# EAGLE board connectors (EAGLE 7.2.0)
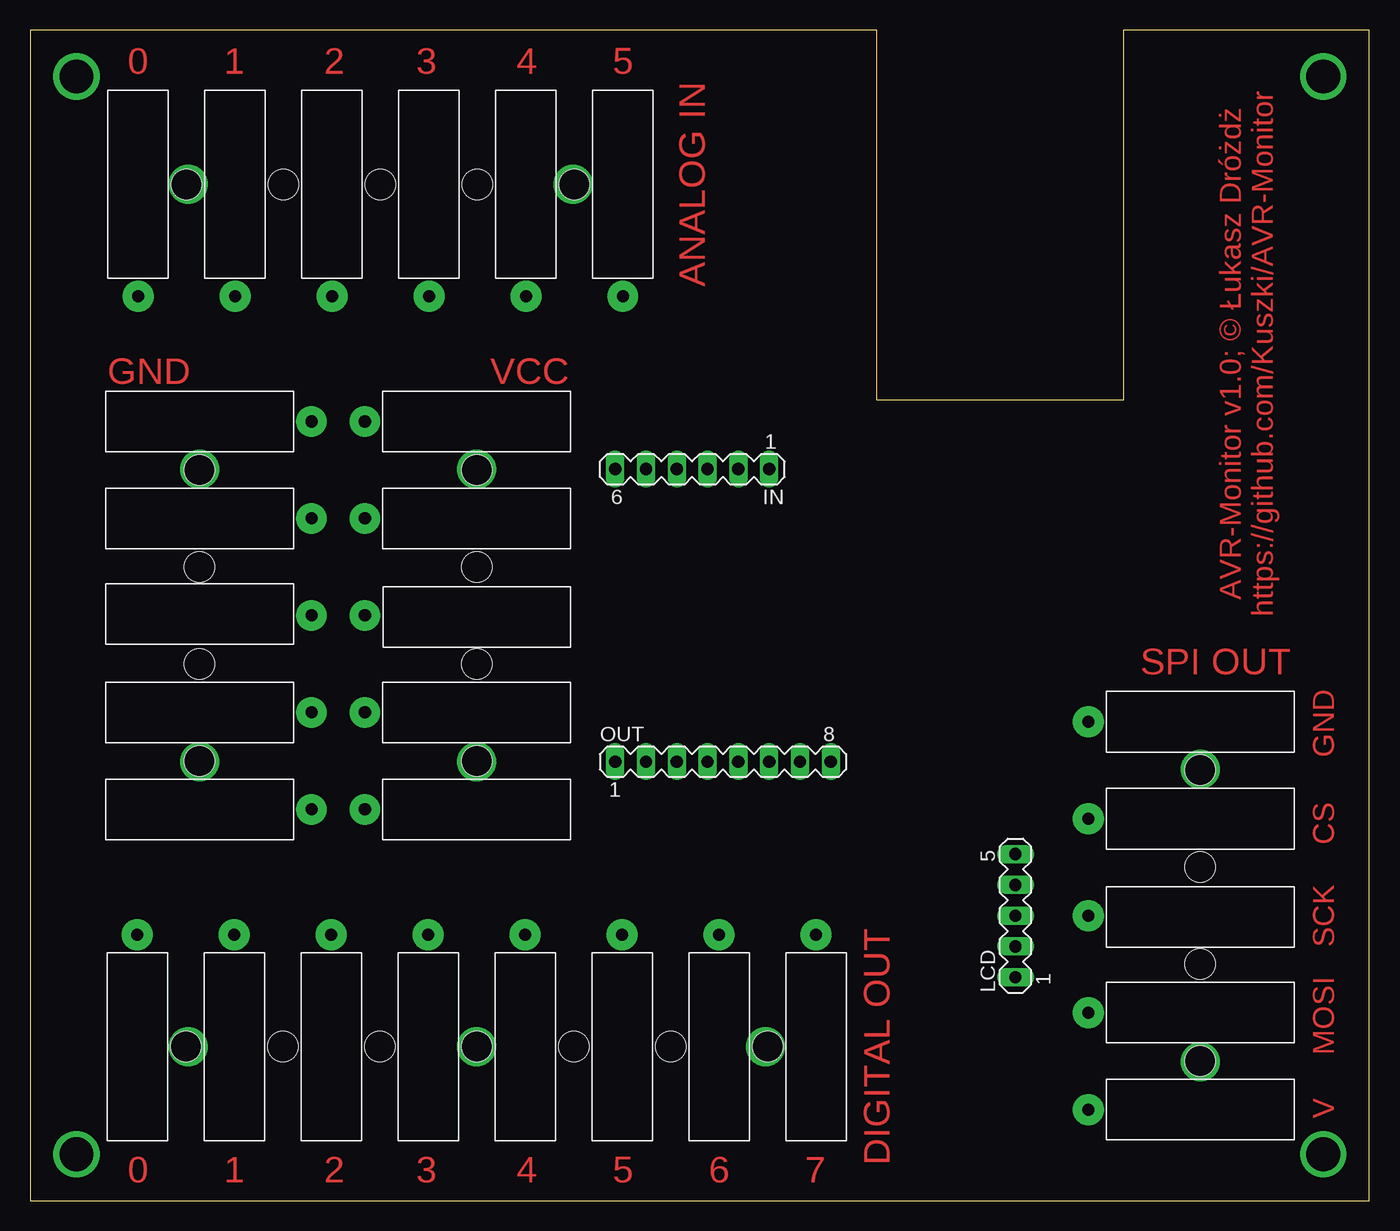
[diagram p0: board, top side]
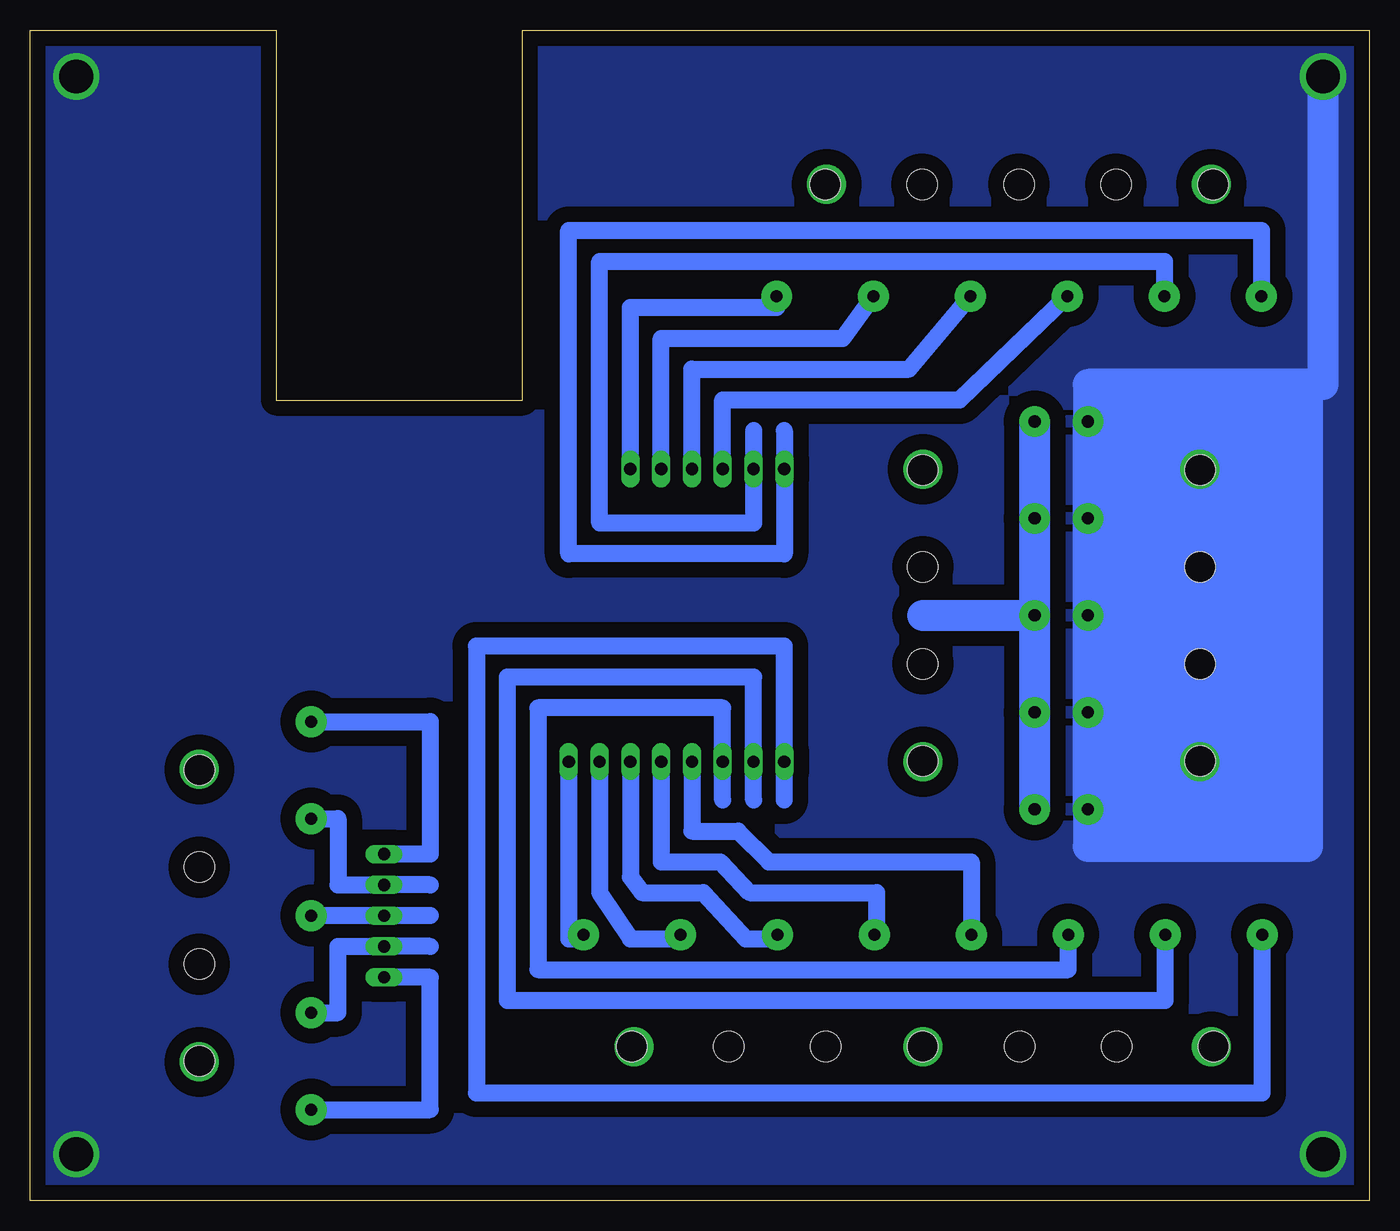
[diagram p1: board, bottom side, seen from below]

Size 110.47 x 96.52 mm. Coordinates in mm from the lower left corner, seen from the top.
Outline: 0,0 110.47,0 110.47,96.51 90.17,96.52 90.17,66.03 69.85,66.03 69.85,96.52 0,96.51 0,0
Copper layers (1*16): Top 0.035mm / dielectric 1.5mm / Bottom 0.035mm
Design rules "default": minimum track width 10mil, minimum drill 24mil, track to track 8mil, track to pad 8mil, pad to pad 8mil, via to via 8mil, smd to smd 8mil, copper to edge 40mil, drill to drill 8mil, minimum pad ring 10mil, minimum via ring 8mil, stop-mask expansion 4mil, vias tented up to drill 0mil, thermal gap 10mil

## Footprints (pad centres in the part's own frame; a part is rotated, then mirrored left to right if it is on the bottom)
MA06-1 = drill 1.016 long: 1 -6.35,0; 2 -3.81,0; 3 -1.27,0; 4 1.27,0; 5 3.81,0; 6 6.35,0
MA05-1 = drill 1.016 long: 1 -5.08,0; 2 -2.54,0; 3 0,0; 4 2.54,0; 5 5.08,0
MA08-1 = drill 1.016 long: 1 -8.89,0; 2 -6.35,0; 3 -3.81,0; 4 -1.27,0; 5 1.27,0; 6 3.81,0; 7 6.35,0; 8 8.89,0
X8 = drill 1 pad 2.54: P$1 -9.23,28; P$2 -9.23,20; P$3 -9.23,12; P$4 -9.23,4; P$5 -9.23,-4; P$6 -9.23,-12; P$7 -9.23,-20; P$8 -9.23,-28 | hole 2.5: 0,0; 0,8; 0,16; 0,-8; 0,-16; 0,-24; 0,24
X5 = drill 1 pad 2.54: P$1 -9.23,16; P$2 -9.23,8; P$3 -9.23,0; P$4 -9.23,-8; P$5 -9.23,-16 | hole 2.5: 0,4; 0,-4; 0,12; 0,-12
X6 = drill 1 pad 2.54: P$1 -9.23,20; P$2 -9.23,12; P$3 -9.23,4; P$4 -9.23,-4; P$5 -9.23,-12; P$6 -9.23,-20 | hole 2.5: 0,-16; 0,16; 0,8; 0,0; 0,-8

## Placement (x,y rotation side)
IN  [MA06-1]  54.61,60.33 180 top
LCD  [MA05-1]  81.28,23.5 90 top
OUT  [MA08-1]  57.15,36.2 0 top
U$1  KOSTKA_2.5MM_X8  [X8]  36.83,12.7 270 top
U$2  KOSTKA_2.5MM_X5  [X5]  36.83,48.26 0 top
U$3  KOSTKA_2.5MM_X6  [X6]  28.89,83.82 90 top
U$4  KOSTKA_2.5MM_X5  [X5]  13.97,48.26 180 top
U$6  KOSTKA_2.5MM_X5  [X5]  96.52,23.5 0 top

## Library data of the parts
IN LCD OUT = con-lstb; OC_FARNELL: unknown; OC_NEWARK: unknown
U$1-U$4 U$6 = kostka

## Nets
GND: U$4.P$1 U$4.P$2 U$4.P$3 U$4.P$4 U$4.P$5
N$1: OUT.8 U$1.P$1
N$3: OUT.7 U$1.P$2
N$4: OUT.6 U$1.P$3
N$5: OUT.5 U$1.P$4
N$6: OUT.4 U$1.P$5
N$7: OUT.3 U$1.P$6
N$8: OUT.2 U$1.P$7
N$9: OUT.1 U$1.P$8
N$17: LCD.1 U$6.P$5
N$24: IN.1 U$3.P$6
N$25: IN.2 U$3.P$5
N$26: IN.3 U$3.P$4
N$27: IN.4 U$3.P$3
N$28: IN.5 U$3.P$2
N$29: IN.6 U$3.P$1
N$36: LCD.2 U$6.P$4
N$37: LCD.3 U$6.P$3
N$38: LCD.4 U$6.P$2
N$39: LCD.5 U$6.P$1
VCC: U$2.P$1 U$2.P$2 U$2.P$3 U$2.P$4 U$2.P$5

## Tracks (layer width: path | path; a pad name or v marks a point on that pad's centre or on a via)
GND  (via drill 2.2, 2.8)
  Bottom 2.54: U$4.P$5 U$4.P$4 U$4.P$3 | U$4.P$3 U$4.P$2 U$4.P$1 | U$4.P$3 21.59,48.26 | 21.59,48.26 21.59,30.48 | 21.59,48.26 21.59,64.77 20.32,64.77 20.32,30.48 19.05,30.48 19.05,64.77 17.78,64.77 17.78,30.48 16.51,30.48 16.51,64.77 15.24,64.77 15.24,60.33 | 15.24,60.33 15.24,30.48 13.97,30.48 v13.97,36.2 v13.97,60.33 | v13.97,60.33 13.97,64.77 12.7,64.77 12.7,30.48 11.43,30.48 11.43,64.77 10.16,64.77 10.16,30.48 8.89,30.48 8.89,64.77 7.62,64.77 7.62,30.48 6.35,30.48 6.35,67.31 23.18,67.31 23.18,29.21 5.08,29.21 5.08,67.31 | 5.08,67.31 7.62,67.31 7.62,66.04 13.97,66.04 | 22.86,66.04 13.97,66.04 | 13.97,66.04 v13.97,60.33 | v13.97,60.33 15.24,60.33 | v3.81,92.71 3.81,67.31 5.08,67.31
  other vias: 3.81,3.81 106.68,3.81 106.68,92.71
  pour Bottom (isolate 1.27): -1.27,97.79 111.76,97.79 111.76,-1.27 -1.27,-1.27
N$1
  Bottom 1.422: OUT.8 66.04,21.59 64.83,21.59 U$1.P$1
N$2
  Bottom 1.422: 50.8,63.5 50.8,60.96
N$3
  Bottom 1.422: OUT.7 63.5,25.4 60.96,21.59 56.83,21.59 U$1.P$2
N$4
  Bottom 1.422: OUT.6 60.96,26.67 60.01,25.4 54.93,25.4 51.44,21.59 48.83,21.59 U$1.P$3
N$5
  Bottom 1.422: OUT.5 58.42,27.94 53.53,27.94 51.12,25.4 40.64,25.4 40.64,21.93 U$1.P$4
N$6
  Bottom 1.422: OUT.4 55.88,30.48 52.07,30.48 49.53,27.94 32.83,27.94 U$1.P$5
N$7
  Bottom 1.422: U$1.P$6 24.83,19.05 68.58,19.05 68.58,40.64 53.34,40.64 OUT.3 53.34,33.02
N$8
  Bottom 1.422: U$1.P$7 16.83,16.51 71.12,16.51 71.12,43.18 50.8,43.18 OUT.2 50.8,33.02
N$9
  Bottom 1.422: U$1.P$8 8.83,8.89 73.66,8.89 73.66,45.72 48.26,45.72 OUT.1 48.26,33.02
N$10
  Bottom 1.422: 48.26,63.5 48.26,60.96
N$13  (via drill 2.2)
  other vias: 13.02,12.7
N$14  (via drill 2.2)
  other vias: 60.64,12.7
N$15  (via drill 2.2)
  other vias: 36.83,12.7
N$16  (via drill 2.2)
  other vias: 36.83,36.2
N$17
  Bottom 1.422: U$6.P$5 77.47,7.5 77.47,18.41 LCD.1
N$18  (via drill 2.2)
  other vias: 36.83,60.33
N$19  (via drill 2.2)
  other vias: 96.52,11.43
N$20  (via drill 2.2)
  other vias: 96.52,35.56
N$21  (via drill 2.2)
  other vias: 13.02,83.82
N$22  (via drill 2.2)
  other vias: 44.77,83.82
N$24
  Bottom 1.422: IN.1 60.96,73.66 48.89,73.66 U$3.P$6
N$25
  Bottom 1.422: IN.2 58.42,71.12 43.43,71.12 U$3.P$5
N$26
  Bottom 1.422: IN.3 55.88,68.58 37.97,68.58 U$3.P$4
N$27
  Bottom 1.422: IN.4 53.34,66.04 33.78,66.04 U$3.P$3
N$28
  Bottom 1.422: IN.5 50.8,55.88 63.5,55.88 63.5,77.47 16.89,77.47 U$3.P$2
N$29
  Bottom 1.422: IN.6 48.26,53.34 66.04,53.34 66.04,80.01 8.89,80.01 U$3.P$1
N$36
  Bottom 1.422: U$6.P$4 85.09,15.49 85.09,20.95 LCD.2 77.47,20.95
N$37
  Bottom 1.422: U$6.P$3 LCD.3 77.47,23.5
N$38
  Bottom 1.422: U$6.P$2 85.09,31.5 85.09,26.04 LCD.4 77.47,26.04
N$39
  Bottom 1.422: U$6.P$1 77.47,39.49 77.47,28.57 LCD.5
VCC
  Bottom 2.54: 36.83,48.26 U$2.P$3 | U$2.P$5 U$2.P$4 U$2.P$3 | U$2.P$3 U$2.P$2 U$2.P$1

## Text on the board
Top: 0 | 1 | 2 | 3 | 4 | 5 | ANALOG IN | AVR-Monitor v1.0; © Łukasz Dróżdż / https://github.com/Kuszki/AVR-Monitor | GND | VCC | SPI OUT | GND | CS | SCK | MOSI | DIGITAL OUT | V | 0 | 1 | 2 | 3 | 4 | 5 | 6 | 7